# EAGLE board Tiny_Programmer (EAGLE 6.5.0)
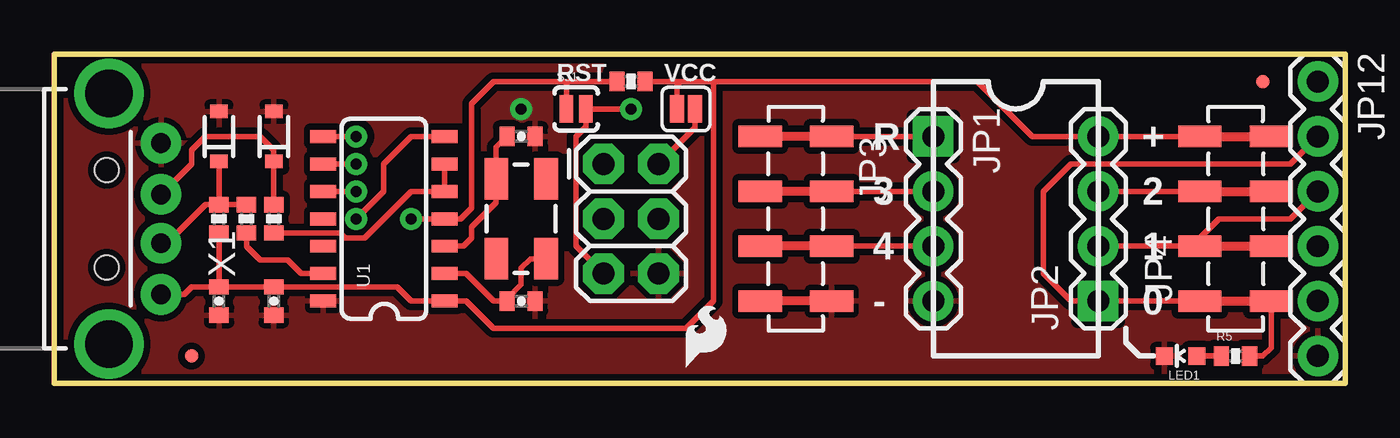
[diagram p0: board, top side]
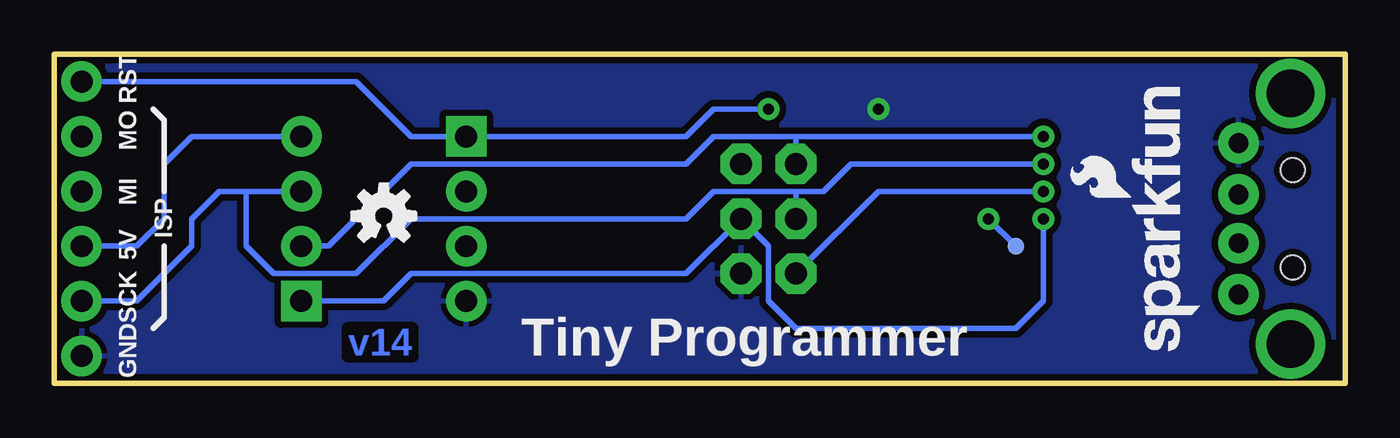
[diagram p1: board, bottom side, seen from below]

Size 59.69 x 15.24 mm. Coordinates in mm from the lower left corner, seen from the top.
Outline: 0,0 59.69,0 59.69,15.24 0,15.24 0,0
Copper layers (1*16): Top 0.035mm / dielectric 1.5mm / Bottom 0.035mm
Design rules "default": minimum track width 8mil, minimum drill 20mil, track to track 8mil, track to pad 8mil, pad to pad 8mil, via to via 8mil, smd to smd 8mil, copper to edge 8mil, drill to drill 8mil, minimum pad ring 12mil, minimum via ring 10mil, stop-mask expansion 4mil, vias tented up to drill 20mil, thermal gap 10mil

## Footprints (pad centres in the part's own frame; a part is rotated, then mirrored left to right if it is on the bottom)
0402-CAP = smd 0.7 x 0.9: 1 -0.65,0; 2 0.65,0
SOD-323 = smd 0.63 x 0.83: 1 -1.15,0; 2 1.15,0
1X04 = drill 1.016 pad 1.88 square: 1 0,0 | drill 1.016 pad 1.88: 2 2.54,0; 3 5.08,0; 4 7.62,0
1X04_SMD_STRAIGHT_COMBO = smd 1 x 2: 1 0,-1.65; 1-2 0,1.65; 2 2.54,1.65; 2-2 2.54,-1.65; 3 5.08,-1.65; 3-2 5.08,1.65; 4 7.62,1.65; 4-2 7.62,-1.65
MICRO-FIDUCIAL = smd 0.635 x 0.635: 1 0,0
2X3 = drill 1.016 pad 1.88 octagon: 1 0,0; 2 0,2.54; 3 2.54,0; 4 2.54,2.54; 5 5.08,0; 6 5.08,2.54
1X06 = drill 1.016 pad 1.88: 1 0,0; 2 2.54,0; 3 5.08,0; 4 7.62,0; 5 10.16,0; 6 12.7,0
LED-0603 = smd 0.8 x 0.8: A 0,-0.75; C 0,0.75
CRYSTAL-SMD-5X3 = smd 1.9 x 1.1: 1 -1.85,-1.15; 2 1.85,-1.15; 3 1.85,1.15; 4 -1.85,1.15
0402-RES = smd 0.7 x 0.9: 1 -0.65,0; 2 0.65,0
SJ_2S-NO = smd 0.635 x 1.27: 1 -0.45,0; 2 0.45,0
SJ_2S = smd 0.635 x 1.27: 1 -0.412,0; 2 0.412,0
PAD.03X.03 = smd 0.762 x 0.762: P$1 0,0
SO14 = smd 0.6 x 1.2: 1 -3.81,-2.8; 2 -2.54,-2.8; 3 -1.27,-2.8; 4 0,-2.8; 5 1.27,-2.8; 6 2.54,-2.8; 7 3.81,-2.8; 8 3.81,2.8; 9 2.54,2.8; 10 1.27,2.8; 11 0,2.8; 12 -1.27,2.8; 13 -2.54,2.8; 14 -3.81,2.8
USB-A-H = drill 0.914 pad 1.88: D+ 2.4,1.127; D- 2.4,-1.127; GND 2.4,3.5; VBUS 2.4,-3.5 | drill 2.2: GND2 0,-5.8; GND3 0,5.8 | hole 1.1: -0.1,2.25; -0.1,-2.25

## Placement (x,y rotation side)
C1  0.1uF  [0402-CAP]  7.62,3.81 270 top
C2  18pF  [0402-CAP]  21.59,11.43 0 top
C3  10uF  [0402-CAP]  10.16,3.81 270 top
C4  18pF  [0402-CAP]  21.59,3.81 0 top
D1  3.3V  [SOD-323]  10.16,11.43 90 top
D2  3.3V  [SOD-323]  7.62,11.43 90 top
FRAME1  FRAME-LETTER  [CREATIVE_COMMONS]  6.35,-10.16 0 top  (outside the outline)
JP1  [1X04]  40.64,11.43 270 top
JP2  [1X04]  48.26,3.81 90 top
JP3  [1X04_SMD_STRAIGHT_COMBO]  34.29,11.43 270 top
JP4  [1X04_SMD_STRAIGHT_COMBO]  54.61,3.81 90 top
JP5  LOGO-SFENW2  [SFE-NEW-WEB]  6.73,1.52 90 bottom
JP6  LOGO-SFESK  [SFE-LOGO-FLAME]  29.21,0.76 0 top
JP7  FIDUCIALUFIDUCIAL  [MICRO-FIDUCIAL]  6.35,1.27 0 top
JP8  FIDUCIALUFIDUCIAL  [MICRO-FIDUCIAL]  55.88,13.97 0 top
JP9  [2X3]  25.4,10.16 270 top
JP11  LOGO-SFESK  [SFE-LOGO-FLAME]  9.91,8.64 90 bottom
JP12  [1X06]  58.42,13.97 270 top
LED1  Yellow  [LED-0603]  52.07,1.27 90 top
Q1  16MHz  [CRYSTAL-SMD-5X3]  21.59,7.62 90 top
R1  68  [0402-RES]  8.89,7.62 270 top
R2  68  [0402-RES]  10.16,7.62 270 top
R3  1.5K  [0402-RES]  7.62,7.62 270 top
R4  10k  [0402-RES]  26.67,13.97 0 top
R5  330  [0402-RES]  54.61,1.27 0 top
SJ1  SOLDERJUMPERNO  [SJ_2S-NO]  24.13,12.7 0 top
SJ2  NC  [SJ_2S]  29.21,12.7 0 top
TP1  TEST-POINT3  [PAD.03X.03]  15.24,6.35 0 bottom
U1  ATTINY84  [SO14]  15.24,7.62 90 top
U$1  OSHW-LOGOS  [OSHW-LOGO-S]  44.45,7.75 0 bottom
X1  USB-A-H  [USB-A-H]  2.54,7.62 0 top

## Library data of the parts
C1-C4 R1-R5 SJ1 SJ2 TP1 = SparkFun-Passives
D1 D2 = SparkFun-DiscreteSemi
FRAME1 JP5 JP6 JP11 U$1 = SparkFun-Aesthetics
JP1-JP4 JP9 JP12 X1 = SparkFun-Connectors
JP7 JP8 = SparkFun
LED1 = SparkFun-LED
Q1 = SparkFun-FreqCtrl
U1 = SparkFun-DigitalIC

## Nets
2: JP1.2 JP3.2
3: JP1.3 JP3.3
D+: R2.2 U1.5 U1.6
D-: R1.2 U1.13
GND: C1.2 C2.2 C3.2 C4.2 D1.2 D2.2 JP1.4 JP3.4 JP9.6 JP12.6 LED1.C U1.14 X1.GND
MISO: JP2.2 JP4.2 JP9.1 JP12.3 U1.8
MOSI: JP2.1 JP4.1 JP9.4 JP12.2 R5.2 U1.7
N$1: D2.1 R1.1 R3.1 X1.D-
N$2: D1.1 R2.1 X1.D+
N$3: C2.1 Q1.3 U1.3
N$4: C4.1 Q1.1 U1.2
N$5: LED1.A R5.1
RESET: R4.1 SJ1.1 TP1.P$1 U1.4
RST: JP1.1 JP3.1 JP9.5 JP12.1 SJ1.2 U1.10
SCK: JP2.3 JP4.3 JP9.3 JP12.5 U1.9
VCC: C1.1 C3.1 JP2.4 JP4.4 JP12.4 R3.2 R4.2 SJ2.1 U1.1 X1.VBUS
VCC': JP9.2 SJ2.2

## Tracks (layer width: path | path; a pad name or v marks a point on that pad's centre or on a via)
2
  Top 0.254: JP1.2 JP3.2
3
  Top 0.254: JP1.3 JP3.3
D+
  Top 0.254: U1.6 U1.5 16.51,8.89 14.35,6.73 13.46,6.73 13.22,6.97 R2.2
D-
  Top 0.254: R1.2 8.9,6.97 8.9,6.33 9.53,5.71 10.79,5.71 11.43,5.08 U1.13
GND  (via drill 0.51)
  other vias: 21.59,12.7
  pour Bottom (isolate 0.305): 0,0 0,15.24 59.69,15.24 59.69,0
  pour Top (isolate 0.305): 0,0 0,15.24 59.69,15.24 59.69,0
MISO  (via drill 0.51)
  Top 0.254: JP2.2 JP4.2 52.96,6.73 53.85,7.62 57.15,7.62 JP12.3 | U1.8 v13.97,11.43
  Bottom 0.254: v13.97,11.43 25.4,11.43 | 25.4,11.43 29.21,11.43 30.48,10.16 43.18,10.16 46.99,6.35 JP2.2 | JP9.1 25.4,11.43
MOSI  (via drill 0.51)
  Top 0.254: JP4.1 JP2.1 46.99,3.81 45.72,5.08 45.72,8.89 46.99,10.16 57.15,10.16 JP12.2 | R5.2 55.88,1.27 56.26,1.65 JP4.1 | U1.7 16.51,11.43 15.24,10.16 15.24,8.89 v13.97,7.62 | JP4.1 56.26,4.19
  Bottom 0.254: v13.97,7.62 13.97,3.81 15.24,2.54 25.4,2.54 26.67,3.81 26.67,6.35 JP9.4 30.48,5.08 43.18,5.08 44.45,3.81 JP2.1
N$1
  Top 0.254: R3.1 R1.1 | D2.1 R3.1 | R3.1 7,8.27 5.22,6.49 X1.D-
N$2
  Top 0.254: X1.D+ 6.35,10.16 6.35,10.79 6.99,11.43 9.53,11.43 10.16,10.79 D1.1 R2.1
N$3
  Top 0.254: U1.3 18.92,6.35 19.3,6.73 19.3,7.24 20.44,8.38 Q1.3 20.44,10.93 C2.1
N$4
  Top 0.254: U1.2 19.05,5.08 20.32,3.81 C4.1 20.94,3.92 21.59,4.57 21.59,5.33 22.03,5.77 Q1.1
N$5
  Top 0.254: R5.1 LED1.A
RESET  (via drill 0.51)
  Top 0.254: v16.51,7.62 U1.4 18.8,7.62 19.3,8.13 19.3,12.95 20.32,13.97 23.62,13.97 | SJ1.1 23.68,13.91 23.62,13.97 | 23.62,13.97 R4.1
  Bottom 0.254: v16.51,7.62 TP1.P$1
RST  (via drill 0.51)
  Top 0.254: U1.10 v13.97,8.89 | JP3.1 JP1.1 | JP9.5 24.13,6.35 24.13,11.43 24.58,11.88 SJ1.2 v26.67,12.7
  Bottom 0.254: v13.97,8.89 21.59,8.89 JP9.5 | v26.67,12.7 29.21,12.7 30.48,11.43 JP1.1 43.18,11.43 45.72,13.97 JP12.1
SCK  (via drill 0.51)
  Top 0.254: v13.97,10.16 U1.9 | JP4.3 JP2.3
  Bottom 0.254: v13.97,10.16 22.86,10.16 24.13,8.89 25.4,8.89 | 25.4,8.89 29.21,8.89 30.48,7.62 43.18,7.62 45.72,5.08 49.53,5.08 50.8,6.35 50.8,8.89 | JP9.3 25.4,8.89 | JP12.5 55.88,3.81 53.34,6.35 53.34,7.62 52.07,8.89 50.8,8.89 | 50.8,8.89 JP2.3
VCC
  Top 0.254: JP4.4 JP2.4 45.21,11.43 42.67,13.97 30.48,13.97 | R3.2 C1.1 | C1.1 C3.1 15.86,4.46 16.51,3.81 U1.1 19.05,3.81 20.32,2.54 29.21,2.54 30.48,3.81 30.48,13.97 | SJ2.1 28.8,13.81 28.96,13.97 | R4.2 28.96,13.97 | 28.96,13.97 30.48,13.97 | X1.VBUS 6.03,4.12 6.37,4.46 C1.1
  Bottom 0.254: JP12.4 55.88,6.35 54.61,7.62 54.61,10.16 53.34,11.43 JP2.4
VCC'
  Top 0.254: SJ2.2 29.62,11.84 JP9.2

## Text on the board
Bottom: v14
tPlace: RST | VCC | R | + | 3 | 2 | 4 | 1 | - | 0
bPlace: RST | MO | MI | ISP | 5V | SCK | Tiny Programmer | GND
tNames: MIT Media Lab | High-Low Tech | hlt.media.mit.edu
tValues: David A. Mellis, Jordan McConnell